# EAGLE board shunt-smd-small (EAGLE 9.4.1)
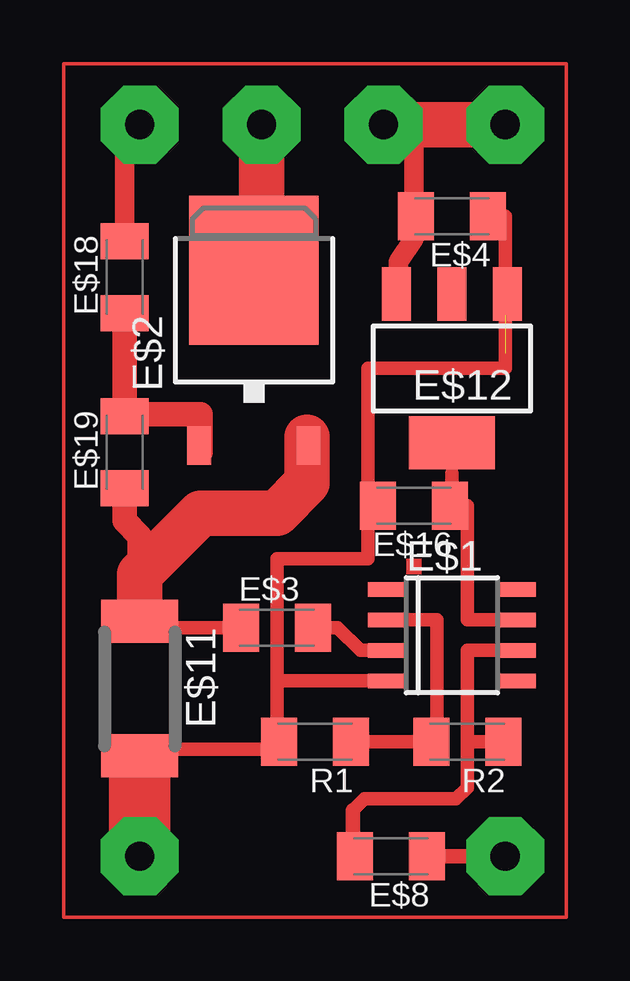
[diagram p0: board, top side]

No outline drawn. Coordinates in mm, seen from the top.
Copper layers (1*16): Top 0.035mm / dielectric 1.5mm / Bottom 0.035mm
Design rules "default": minimum track width 6mil, minimum drill 0.35mm, track to track 6mil, track to pad 6mil, pad to pad 6mil, via to via 6mil, smd to smd 6mil, copper to edge 40mil, drill to drill 6mil, minimum pad ring 10mil, minimum via ring 8mil, stop-mask expansion 4mil, vias tented up to drill 0mil, thermal gap 10mil

## Footprints (pad centres in the part's own frame; a part is rotated, then mirrored left to right if it is on the bottom)
SOIC8 = smd 0.6 x 1.5: 1 -1.905,-2.75; 2 -0.635,-2.75; 3 0.635,-2.75; 4 1.905,-2.75; 5 1.905,2.75; 6 0.635,2.75; 7 -0.635,2.75; 8 -1.905,2.75
TO252 = smd 1 x 1.6: 1 -2.28,-4.8; 2 2.28,-4.8 | smd 5.4 x 6.2: 3 0,2.5
C1206K = smd 1.5 x 2: 1 -1.5,0; 2 1.5,0
R2512 = smd 1.8 x 3.2: 1 -2.8,0; 2 2.8,0
SOT223 = smd 1.219 x 2.235: 1 -2.311,-3.099; 2 0,-3.099; 3 2.311,-3.099 | smd 3.6 x 2.2: 4 0,3.099

## Placement (x,y rotation side)
E$1  mcp601  [SOIC8]  19.05,13.02 270 top
E$2  LR7843  [TO252]  10.79,25.72 0 top
E$3  1k  [C1206K]  11.75,13.34 0 top
E$4  1mk  [C1206K]  19.05,30.48 180 top
E$8  1k  [C1206K]  16.51,3.81 180 top
E$11  0.02R  [R2512]  6.03,10.79 270 top
E$12  1117  [SOT223]  19.05,24.13 180 top
E$16  1mk  [C1206K]  17.46,18.41 180 top
E$18  510R  [C1206K]  5.4,27.94 90 top
E$19  10k  [C1206K]  5.4,20.64 90 top
R1  330R  [C1206K]  13.34,8.57 180 top
R2  22K  [C1206K]  19.68,8.57 180 top

## Library data of the parts
E$1 E$2 = linear
E$3 E$4 E$8 E$11 E$16 E$18 E$19 R1 R2 = rcl
E$12 = transistor-pnp

## Tracks (layer width: path | path; a pad name or v marks a point on that pad's centre or on a via)
S$1
  Top 0.559: 19.05,19.76 19.05,18.41 19.68,18.41 19.68,13.65 21.91,13.65
S$2
  Top 1.905: 11.11,28.26 11.11,34.29
S$3
  Top 1.905: 6.03,14.29 6.03,15.56 8.57,18.1 11.75,18.1 13.02,19.37 13.02,21.27
S$4
  Top 1.016: 8.57,20.64 8.57,22.23 5.4,22.23 5.4,26.35
S$5  (via drill 1.22 pad 3.25)
  other vias: 6.03,3.81
S$6  (1 unrouted)
  Top 0.559: 16.51,11.11 11.75,11.11 | 11.75,11.11 11.75,16.19 15.56,16.19 15.56,24.13 21.27,24.13 21.27,26.35 | 11.75,11.11 11.75,8.26 5.71,8.26 | 21.27,30.48 21.27,24.77
S$7
  Top 0.152: 23.81,1.27 2.86,1.27 2.86,36.83 23.81,36.83 23.81,1.27
S$8
  Top 1.016: 5.4,19.05 5.4,17.78 6.03,17.14 6.03,14.29
S$9
  Top 0.559: 16.51,12.38 15.24,12.38 14.29,13.34 13.02,13.34
S$10  (via drill 1.22 pad 3.25)
  Top 0.813: 16.83,26.67 16.83,28.57 17.46,29.53 17.46,34.29
  Top 1.905: v21.27,34.29 17.46,34.29 v16.19,34.29
S$11
  Top 0.559: 16.51,13.65 18.41,13.65 18.41,8.57 14.61,8.57
S$12
  Top 0.559: 14.92,5.71 15.4,6.19 19.21,6.19 19.68,6.67 19.68,8.57 | 19.68,8.57 19.68,12.38 21.91,12.38 | 19.68,8.57 20.95,8.57
  Top 0.61: 14.92,4.45 14.92,5.71
S$17  (via drill 1.22 pad 3.25)
  other vias: 11.11,34.29
S$18
  Top 0.559: 10.16,13.34 5.4,13.34
S$20  (via drill 1.22 pad 3.25)
  Top 0.813: v6.03,34.29 5.4,33.66 5.4,29.53
S$21  (via drill 1.22 pad 3.25)
  Top 0.61: v21.27,3.81 18.1,3.81
(copper drawn outside any net)
  shapes: Top area x2